# Altium PCB eHub.PcbDoc
Units mm, origin at the board's own origin, x right, y up, seen from the top; angles counter-clockwise.
Board outline 78.49 x 44.83 mm, 2 copper layers (Top Layer, Bottom Layer); 86 components, 70 nets, 303 pads, 59 vias.
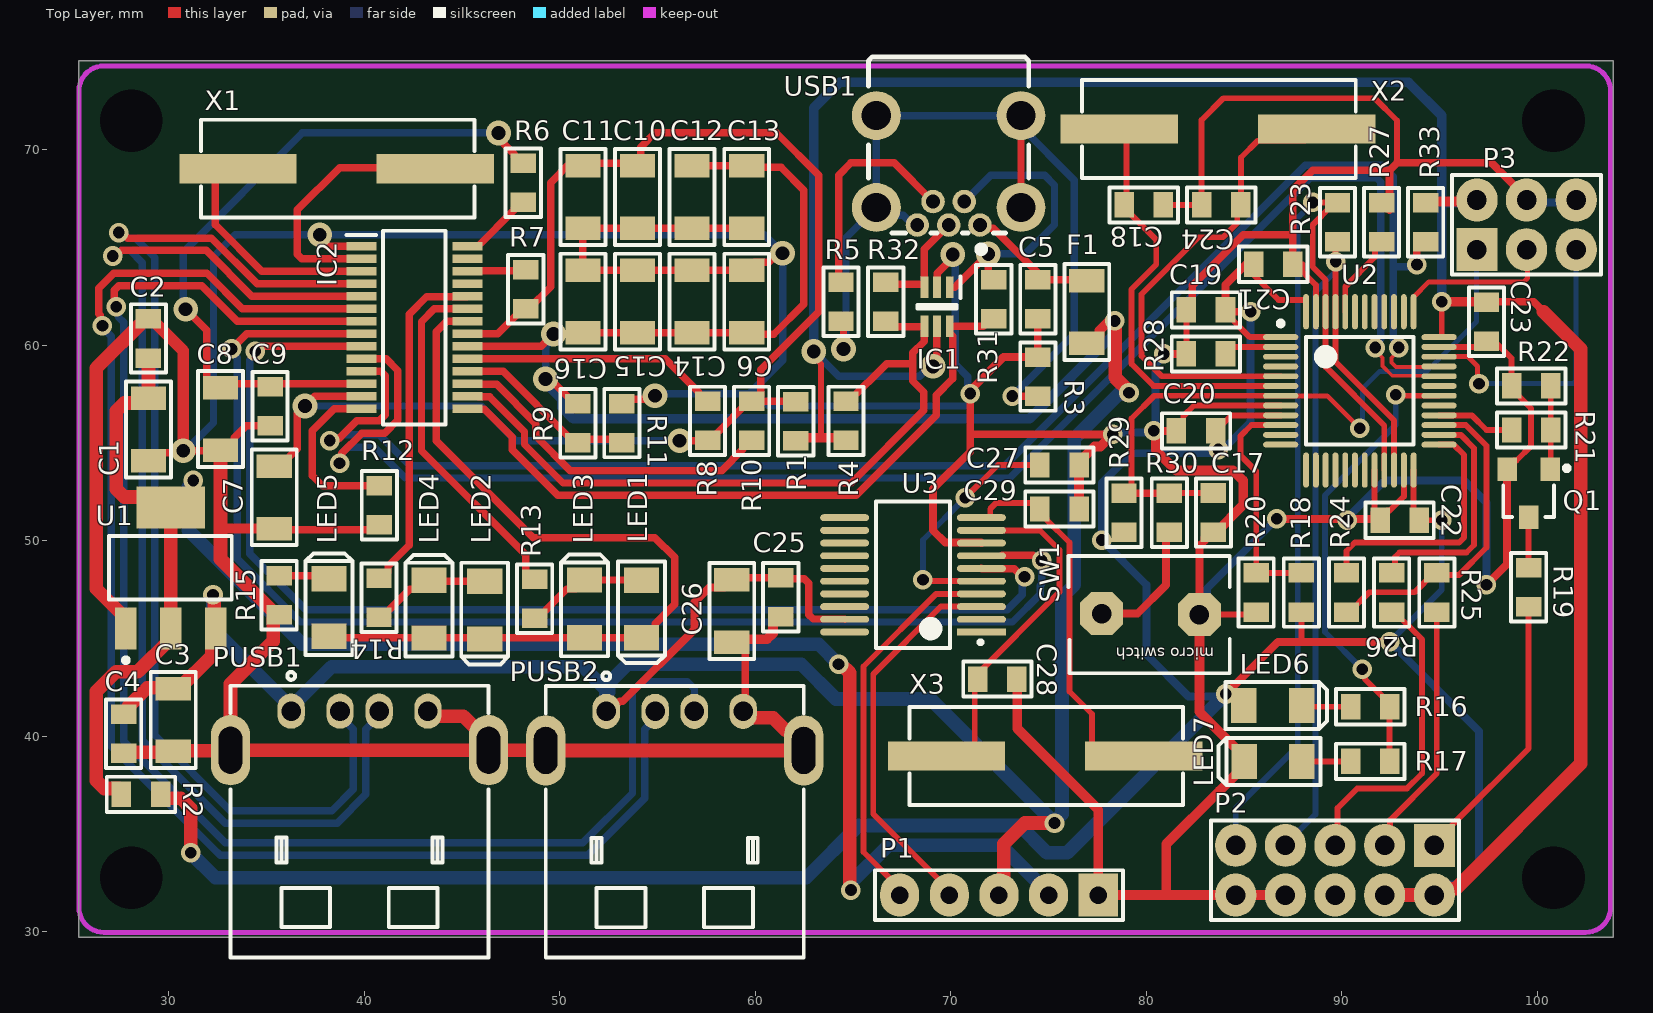
[diagram p0: Top Layer view]
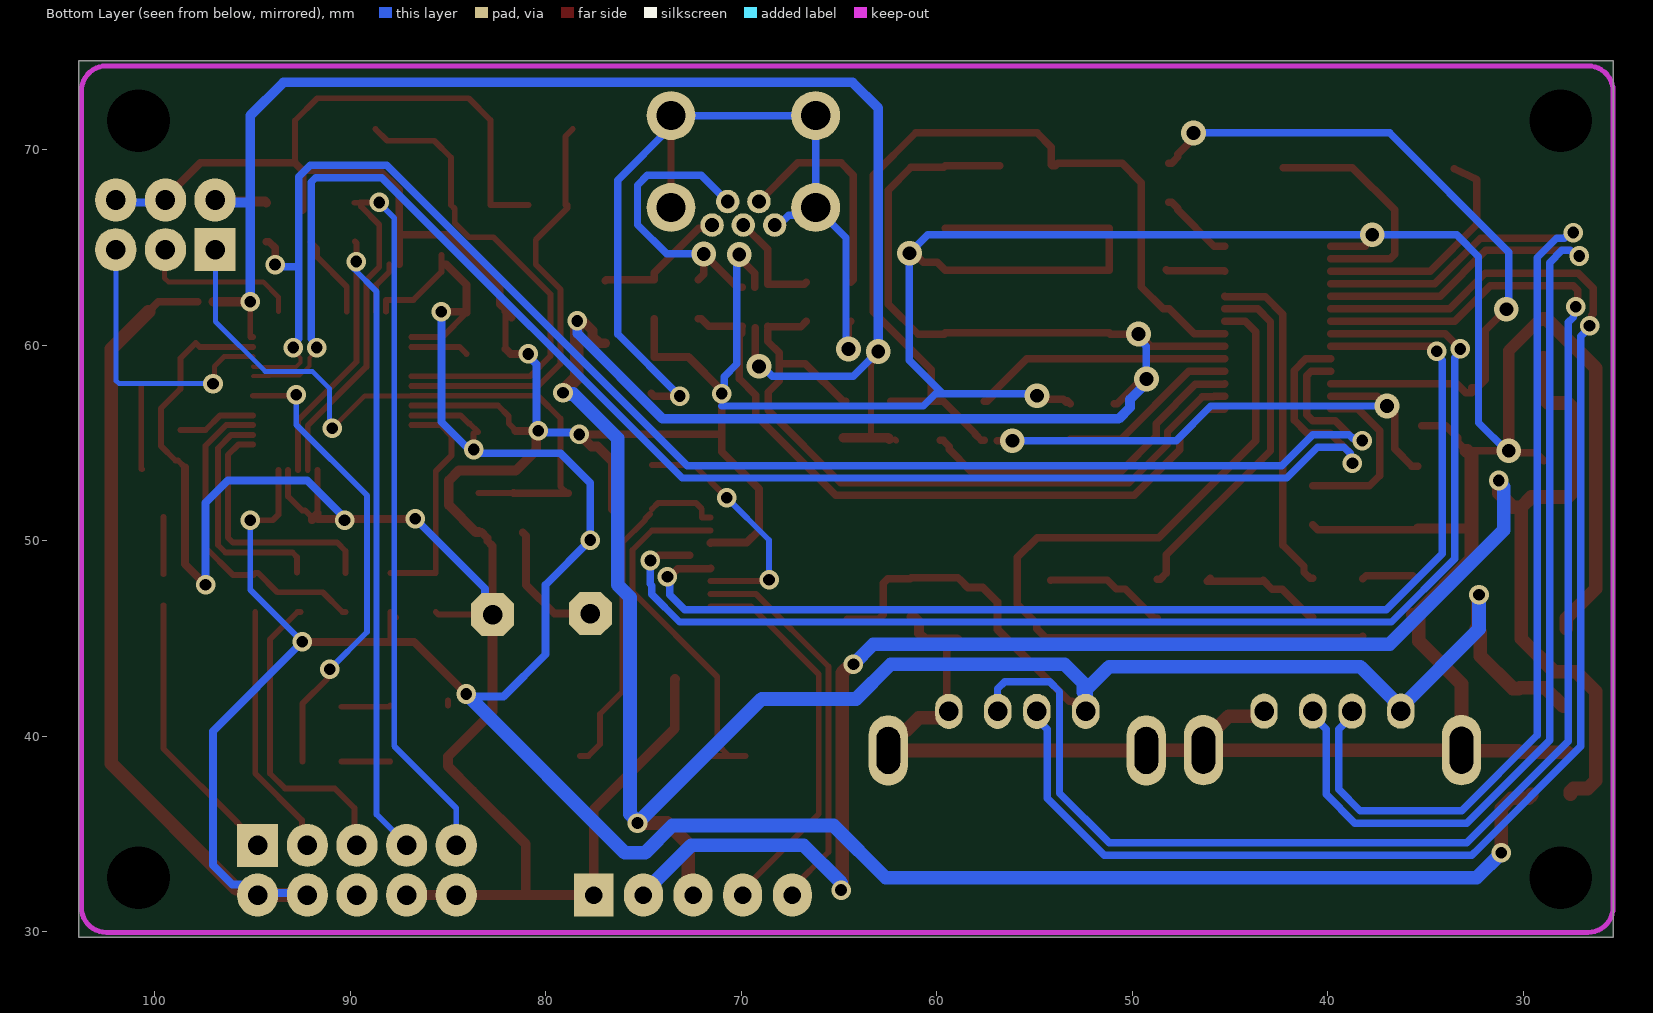
[diagram p1: Bottom Layer view, seen from below]

## Layer stack, top to bottom
Top Solder: solder mask 0.0102, Solder Resist, Dk 3.5
Top Layer: signal copper 0.0356
Dielectric 1: dielectric 0.32, FR-4, Dk 4.8
Bottom Layer: signal copper 0.0356
Bottom Solder: solder mask 0.0102, Solder Resist, Dk 3.5

## Board outline
25.4,29.718 103.886,29.718 103.886,74.549 25.4,74.549

## Design rules (kind name [scope] priority, off if disabled: settings)
Clearance [All] p1: gap=0.2 ignorepadtopadclearanceinfootprint=FALSE
DiffPairsRouting [All] p1: maxlimit=0.254 minlimit=0.254 mostfreqgap=0.254 toplayer_minwidth=0.2 toplayer_maxwidth=0.381 toplayer_prefwidth=0.381 bottomlayer_minwidth=0.2 bottomlayer_maxwidth=0.381 bottomlayer_prefwidth=0.381 maxuncoupledlength=12.7
PolygonConnect [All] p1: connectstyle=Relief reliefconductorwidth=0.254 reliefentries=4 polygonreliefangle="90 Angle" airgapwidth=0.254
RoutingVias [All] p1: holewidth=0.1 width=1 viastyle="Through Hole" minholewidth=0.5 minwidth=0.9 maxholewidth=0.6 maxwidth=3
SolderMaskExpansion [All] p1: expansion=0.102 istentingtop=FALSE
Width [All] p1: maxlimit=3 minlimit=0.254 preferedwidth=0.7
29 further rules are at their usual default settings.

## Classes and differential pairs
component class Designator: C1 C2 C3 C4 R1 R2 U1
component class Serial: C25 C26 C27 C28 C29 U3 X3
component class Programmer: C17 C18 C19 C20 C21 C22 C23 C24 LED6 LED7 P2 P3 Q1 R16 R17 R18 R19 R20 R21 R22 R23 R24 R25 R26 R27 R28 R29 R30 R33 SW1 U2 X2
component class Hub: C5 C6 C7 C8 C9 C10 C11 C12 C13 C14 C15 C16 F1 IC1 IC2 LED1 LED2 LED3 LED4 LED5 R3 R4 R5 R6 R7 R8 R9 R10 R11 R12 R13 R14 R15 R31 R32 USB1 X1
component class eHub: P1 PUSB1 PUSB2
differential pair USB: +USB_P -USB_N
differential pair SERIAL_UD: +SERIAL_UD_P -SERIAL_UD_N
differential pair PRG_UD: +PRG_UD_P -PRG_UD_N
differential pair USB_4: +USB_4_P -USB_4_N
differential pair USB_3: +USB_3_P -USB_3_N

## Components (designator, comment, footprint, x,y, rotation, side; value= is the part's Value field where it differs from the comment)
C1 "10uF" "Res 1206" 28.956,55.797 r90 top
C2 "100nF" "RES 0805" 28.956,60.351 r90 top
C3 "10uF" "Res 1206" 30.226,40.937 r90 top
C4 "100nF" "RES 0805" 27.686,40.132 r270 top
C5 "100nF" "RES 0805" 74.458,62.357 r270 top
C6 "10uF" "Res 1206" 59.563,62.137 r270 top
C7 "10uF" "Res 1206" 35.393,52.126 r270 top
C8 "10uF" "Res 1206" 32.639,56.134 r270 top
C9 "100nF" "RES 0805" 35.179,56.88 r270 top
C10 "10uF" "Res 1206" 53.975,67.691 r90 top
C11 "1uF" "Res 1206" 51.181,67.691 r90 top
C12 "10uF" "Res 1206" 56.769,67.691 r90 top
C13 "10uF" "Res 1206" 59.563,67.691 r90 top
C14 "1uF" "Res 1206" 56.769,62.137 r270 top
C15 "1uF" "Res 1206" 53.975,62.137 r270 top
C16 "47uF" "Res 1206" 51.181,62.137 r270 top
C17 "100nF" "RES 0805" 83.439,51.447 r270 top
C18 "22pF" "RES 0805" 79.883,67.183 r0 top
C19 "100nF" "RES 0805" 83.058,61.817 r180 top
C20 "100nF" "RES 0805" 82.55,55.626 r180 top
C21 "100nF" "RES 0805" 86.503,64.149 r0 top
C22 "100nF" "RES 0805" 92.964,51.054 r180 top
C23 "100nF" "RES 0805" 97.411,61.214 r270 top
C24 "22pF" "RES 0805" 83.837,67.183 r180 top
C25 "100nF" "RES 0805" 61.305,47.117 r270 top
C26 "10uF" "Res 1206" 58.801,46.506 r90 top
C27 "100nF" "RES 0805" 75.565,53.88 r0 top
C28 "22pF" "RES 0805" 72.39,42.926 r0 top
C29 "22pF" "RES 0805" 75.565,51.625 r0 top
F1 "500mA" "Res 1206" 76.962,61.607 r270 top
IC1 "USBUF02W6" SOT65P210X110-6N 69.304,61.976 r270 top
IC2 "FE1.1S-BSOP28BCN" SOP64P600X175-28N 42.561,60.911 r0 top
LED1 "LED 1206" "LED 1206" 54.176,46.391 r270 top
LED2 "LED 1206" "LED 1206" 46.16,46.327 r270 top
LED3 "LED 1206" "LED 1206" 51.271,46.645 r90 top
LED4 "LED 1206" "LED 1206" 43.306,46.628 r90 top
LED5 "LED 1206" "LED 1206" 38.198,46.708 r90 top
LED6 "LED 1206" "LED 1206" 86.602,41.571 r0 top
LED7 "LED 1206" "LED 1206" 86.36,38.717 r180 top
P1 "Header, 5-Pin" HDR1X5 77.548,31.877 r180 top
P2 "Header 5X2" HDR2X5 94.742,34.417 r180 top
P3 "Header 3X2" HDR2X3 96.922,64.897 r0 top
PUSB1 "CONN_USB_A" USB_A_REC_RA_THD 39.755,41.287 r180 top
PUSB2 "CONN_USB_A" USB_A_REC_RA_THD 55.88,41.275 r180 top
Q1 "S8050" SOT-23 99.568,52.463 r180 top
R1 "0R" "RES 0805" 62.071,56.118 r90 top
R2 "0R" "RES 0805" 28.575,37.028 r180 top
R3 "0.22R" "RES 0805" 74.458,58.403 r90 top
R4 "1K5" "RES 0805" 64.643,56.134 r90 top
R5 "100K" "RES 0805" 64.389,62.23 r90 top
R6 "0R" "RES 0805" 48.133,68.326 r90 top
R7 "10K" "RES 0805" 48.26,62.865 r270 top
R8 "100K" "RES 0805" 57.563,56.134 r270 top
R9 "4K7" "RES 0805" 50.923,56.007 r90 top
R10 "NA" "RES 0805" 59.817,56.134 r90 top
R11 "100K" "RES 0805" 53.177,56.023 r270 top
R12 "2K7/1%" "RES 0805" 40.767,51.816 r270 top
R13 "1K" "RES 0805" 48.715,47.042 r270 top
R14 "1K" "RES 0805" 40.752,47.089 r270 top
R15 "1K" "RES 0805" 35.643,47.216 r90 top
R16 "220R" "RES 0805" 91.456,41.511 r180 top
R17 "220R" "RES 0805" 91.456,38.717 r180 top
R18 "10K" "RES 0805" 87.938,47.355 r270 top
R19 "100R" "RES 0805" 99.568,47.625 r90 top
R20 "10K" "RES 0805" 85.628,47.355 r90 top
R21 "1K" "RES 0805" 99.695,55.67 r0 top
R22 "10K" "RES 0805" 99.695,57.924 r180 top
R23 "220R" "RES 0805" 89.789,66.294 r270 top
R24 "100R" "RES 0805" 90.249,47.355 r90 top
R25 "22R" "RES 0805" 94.869,47.355 r90 top
R26 "22R" "RES 0805" 92.559,47.355 r90 top
R27 "10K" "RES 0805" 92.043,66.294 r270 top
R28 "10K" "RES 0805" 83.058,59.563 r0 top
R29 "10K" "RES 0805" 78.867,51.43 r90 top
R30 "100R" "RES 0805" 81.185,51.431 r270 top
R31 "0R" "RES 0805" 72.203,62.357 r90 top
R32 "0R" "RES 0805" 66.675,62.23 r90 top
R33 "1K5" "RES 0805" 94.298,66.294 r90 top
SW1 "Pushing Switch" "micro sch" 82.724,46.226 r180 top
U1 "AMS1117" SOT-223 30.099,48.616 r0 top
U2 "STM32F103C8T6" STM-LQFP48_N 90.932,57.67 r0 top
U3 "CH340" SSOP20 68.072,48.26 r180 top
USB1 "MINI USB" "USB MINI DIP" 70.055,70.215 r0 top
X1 "12MHz" "XTAL - SMD" 38.735,68.84 r180 top
X2 "8MHz" "XTAL - SMD" 83.82,70.866 r180 top
X3 "8MHz" "XTAL - SMD" 74.983,38.789 r180 top

## Footprints (in the part's own frame and the unit in brackets; to place one, negate y for a bottom-side part, rotate by r counter-clockwise, add the part's x,y. Pads: shape width x height; smd on the part's side, far side on the other; paste and mask are expansions set on the pad)
HDR1X5 [mm] "Connector; Header; 5 Position"
  rect 2x2.2 hole 0.9: 1(0,0)
  oval 2x2.2 hole 0.9: 2(2.54,0) 3(5.08,0) 4(7.62,0) 5(10.16,0)
  silkscreen extent -1.27,-1.27 11.43,1.27, body extent -1.27,-1.21 11.43,1.28, height 9.54
HDR2X3 [mm] "Connector; Header; 3x2 Position"
  rect 2.1x2.2 hole 1: 1(0,0)
  oval 2.1x2.2 hole 1: 2(0,2.54) 3(2.54,0) 4(2.54,2.54) 5(5.08,0) 6(5.08,2.54)
  silkscreen extent -1.27,-1.27 6.35,3.81, body extent -1.33,-1.23 6.29,3.8, height 9.54
HDR2X5 [mm] "Connector; Header; 5x2 Position"
  rect 2.1x2.2 hole 1: 1(0,0)
  oval 2.1x2.2 hole 1: 2(0,2.54) 3(2.54,0) 4(2.54,2.54) 5(5.08,0) 6(5.08,2.54) 7(7.62,0) 8(7.62,2.54) 9(10.16,0) 10(10.16,2.54)
  silkscreen extent -1.27,-1.27 11.43,3.81, body extent -1.27,-1.21 11.43,3.82, height 9.54
"LED 1206" [mm]
  rect 1.3x1.8 smd: 1(-1.6,0) 2(1.35,0)
  silkscreen extent -2.55,-1.2 2.65,1.2, body extent -1.75,-0.79 1.45,0.81, height 1.1
"micro sch" [mm]
  oct 2.2x2.2 hole 1: 1(0,0) 2(5,-0.05)
  silkscreen extent -1.55,-3 6.7,3, body extent -1.56,-3 6.66,3, height 9.5
"RES 0805" [mm]
  rect 1x1.3 smd: 1(1,0) 2(-1,0)
  silkscreen extent -1.75,-0.9 1.75,0.9, body extent -1,-0.62 1,0.62, height 0.78
"Res 1206" [mm]
  rect 1.2x1.8 smd: 1(-1.7,0) 2(1.5,0)
  silkscreen extent -2.55,-1.15 2.35,1.15, body extent -1.7,-0.83 1.5,0.83
SOP64P600X175-28N [mm]
  rect 1.525x0.44 smd: 1(-2.712,4.16) 2(-2.712,3.52) 3(-2.712,2.88) 4(-2.712,2.24) 5(-2.712,1.6) 6(-2.712,0.96) 7(-2.712,0.32) 8(-2.712,-0.32) 9(-2.712,-0.96) 10(-2.712,-1.6) 11(-2.712,-2.24) 12(-2.712,-2.88) 13(-2.712,-3.52) 14(-2.712,-4.16) 15(2.712,-4.16) 16(2.712,-3.52) 17(2.712,-2.88) 18(2.712,-2.24) 19(2.712,-1.6) 20(2.712,-0.96) 21(2.712,-0.32) 22(2.712,0.32) 23(2.712,0.96) 24(2.712,1.6) 25(2.712,2.24) 26(2.712,2.88) 27(2.712,3.52) 28(2.712,4.16)
  silkscreen extent -3.47,-4.95 1.6,4.95, body extent -3,-4.95 3,4.95, height 1.75
SOT65P210X110-6N [mm]
  rect 1.1x0.4 smd: 1(-1,0.65) 2(-1,0) 3(-1,-0.65) 4(1,-0.65) 5(1,0) 6(1,0.65)
  silkscreen extent -1.55,-1 0.1,1.2, body extent -1.05,-1 1.05,1, height 1.1
SOT-23 [mm] "SOT-23; 3 Leads; Body 3.0 x 2.6 mm, inc. leads (LxW max)"
  rect 1x1.2 smd: 1(-1.1,-1.2) 2(1.1,-1.2) 3(0,1.25)
  silkscreen extent -2.08,-1.37 1.3,1.25, body extent -1.5,-1.32 1.5,1.32, height 1.08
SOT-223 [mm] "SOT-223/SC-73; 4 Leads; Body 6.7 x 7.3 mm, inc. leads (LxW max)"
  rect 1.1x2.15 smd: 1(-2.3,-3.1) 2(0,-3.1) 3(2.3,-3.1)
  rect 3.5x2.15 smd: 4(0,3.1)
  silkscreen extent -3.16,-4.85 3.12,1.63, body extent -3.26,-3.49 3.24,3.47, height 1.7
SSOP20 [mm] "SSOP20"
  rect 2.5x0.35 smd: 1(-3.5,2.925)
  oval 2.5x0.35 smd: 2(-3.5,2.275) 3(-3.5,1.625) 4(-3.5,0.975) 5(-3.5,0.325) 6(-3.5,-0.325) 7(-3.5,-0.975) 8(-3.5,-1.625) 9(-3.5,-2.275) 10(-3.5,-2.925) 11(3.5,-2.925) 12(3.5,-2.275) 13(3.5,-1.625) 14(3.5,-0.975) 15(3.5,-0.325) 16(3.5,0.325) 17(3.5,0.975) 18(3.5,1.625) 19(3.5,2.275) 20(3.5,2.925)
  silkscreen extent -3.55,-3.75 1.9,3.75, body extent -3.9,-3.6 4,3.7, height 1.79
STM-LQFP48_N [mm] "QFP, 48-Leads, Body 7x7mm, Pitch 0.5mm, IPC Medium Density"
  oval 1.8x0.3 smd: 1(-4.05,2.75) 2(-4.05,2.25) 3(-4.05,1.75) 4(-4.05,1.25) 5(-4.05,0.75) 6(-4.05,0.25) 7(-4.05,-0.25) 8(-4.05,-0.75) 9(-4.05,-1.25) 10(-4.05,-1.75) 11(-4.05,-2.25) 12(-4.05,-2.75) 25(4.05,-2.75) 26(4.05,-2.25) 27(4.05,-1.75) 28(4.05,-1.25) 29(4.05,-0.75) 30(4.05,-0.25) 31(4.05,0.25) 32(4.05,0.75) 33(4.05,1.25) 34(4.05,1.75) 35(4.05,2.25) 36(4.05,2.75)
  oval 0.3x1.8 smd: 13(-2.75,-4.05) 14(-2.25,-4.05) 15(-1.75,-4.05) 16(-1.25,-4.05) 17(-0.75,-4.05) 18(-0.25,-4.05) 19(0.25,-4.05) 20(0.75,-4.05) 21(1.25,-4.05) 22(1.75,-4.05) 23(2.25,-4.05) 24(2.75,-4.05) 37(2.75,4.05) 38(2.25,4.05) 39(1.75,4.05) 40(1.25,4.05) 41(0.75,4.05) 42(0.25,4.05) 43(-0.25,4.05) 44(-0.75,4.05) 45(-1.25,4.05) 46(-1.75,4.05) 47(-2.25,4.05) 48(-2.75,4.05)
  silkscreen extent -4.17,-2.75 2.75,3.57, body extent -3.5,-3.5 3.5,3.5, height 1.6
"USB MINI DIP" [mm]
  round 1.2 hole 0.7: 1(1.44,-4.06) 2(0.64,-2.86) 3(-0.16,-4.06) 4(-0.96,-2.86) 5(-1.76,-4.06)
  round 2.5 hole 1.5: 6(3.54,-3.16) 7(-3.86,-3.16) 8(-3.86,1.54) 9(3.54,1.54)
  silkscreen extent -4.26,-5.4 3.94,4.54, body extent -4.02,-4.15 4.13,4.67, height 3.95
USB_A_REC_RA_THD [mm] "CONN, USB A, Receptacle, RIGHT ANGLE, THD"
  oval 1.4x1.8 hole 1: 1(3.5,0) 2(1,0) 3(-1,0) 4(-3.5,0)
  oval 2x3.6 hole 1.2 slot 2.4 at 90 deg: SH1(-6.6,2) SH2(6.6,2)
  silkscreen extent -6.6,-2 6.6,12.6, body extent -7.9,-1.2 7.9,12.5, height 6.95
"XTAL - SMD" [mm]
  rect 6x1.5 smd: 1(-4.9,-0.2) 2(5.2,-0.2)
  silkscreen extent -6.9,-2.7 7.1,2.3, body extent -6.85,-2.7 7.05,2.3, height 4.5

## Part data
C1 C3 C6 C7 C8 C10 C11 C12 C13 C14 C15 C16 C26: library part "CAP 1206"
C2 C4 C5 C9 C17 C18 C19 C20 C21 C22 C23 C24 C25 C27 C28 C29: library part "CAP 0805"
F1: library part "FUSE 1206"
IC1: "Integrated Circuit", Manufacturer_Name=STMicroelectronics, Mouser Part Number=511-USBUF02W6, Arrow Part Number=USBUF02W6, Arrow Price/Stock=https://www.arrow.com/en/products/usbuf02w6/stmicroelectronics?region=nac, Datasheet Link=http://www.st.com/web/en/resource/technical/document/datasheet/CD00002046.pdf, Height=1.1mm, Manufacturer_Part_Number=USBUF02W6, Mouser Price/Stock=https://www.mouser.co.uk/ProductDetail/STMicroelectronics/USBUF02W6?qs=po45yt2pPpsSshudxXreiQ%3D%3D
IC2: "Integrated Circuit", Manufacturer_Name="Terminus Technology", Datasheet Link=https://datasheet.lcsc.com/lcsc/1811021220_Terminus-Tech-FE1-1S-BSOP28BCN_C9359.pdf, Height=1.75mm, Manufacturer_Part_Number=FE1.1S-BSOP28BCN
P1: library part "Header 5", LatestRevisionDate=17-Jul-2002, LatestRevisionNote="Re-released for DXP Platform.", Publisher="Altium Limited"
P2: "Header, 5-Pin, Dual row", LatestRevisionDate=17-Jul-2002, LatestRevisionNote="Re-released for DXP Platform.", Publisher="Altium Limited"
P3: "Header, 3-Pin, Dual row", LatestRevisionDate=17-Jul-2002, LatestRevisionNote="Re-released for DXP Platform.", Publisher="Altium Limited"
PUSB1 PUSB2: library part CONN_USB_A_REC_RA_THD, "CONN, USB, A, RECEPTACLE, R/A, THD"
Q1: library part "S8050 SMD"
R1 R2 R3 R4 R5 R6 R7 R8 R9 R11 R12 R13 R14 R15 R16 R17 R18 R19 R20 R21 R22 R23 R24 R25 R26 R27 R28 R29 R30 R31 R32 R33: library part "RES 0805"
R10: library part "RES 0805", "100K"
SW1: library part "Pushing Switch 2Pin", LatestRevisionDate=17-Jul-2002, LatestRevisionNote="Re-released for DXP Platform.", PackageReference=SPST-2, Published=24-Mar-1999, Publisher="Altium Limited"
U1: "Regulators"
U2: "ARM Cortex-M3 32-bit MCU, 64 KB Flash, 20 KB Internal RAM, 37 I/Os, 48-pin LQFP, -40 to 85 degC, Tray", I/Os (High Current)=37, Operating Frequency(F) (Processor speed) (MHz)=72, Supplier Part Number 1=497-6063-ND, Supply Voltage(Vcc) min (V)=2, A/D Converter="2x12-bit (10 Channel)", ComponentLink1Description="Manufacturer URL", ComponentLink1URL=http://www.st.com/web/en/home.html, ComponentLink2Description=Datasheet, ComponentLink2URL=http://www.st.com/st-web-ui/static/active/en/resource/technical/document/datasheet/CD00161566.pdf, ComponentLink3Description="Package Specification", ComponentLink3URL=http://www.st.com/st-web-ui/static/active/en/resource/technical/document/datasheet/DM00058181.pdf, Core="ARM Cortex-M3", DatasheetVersion="Rev. 16", FLASH Size (Prog) (kB)=64, Internal RAM Size (kB)=20, Mounting Technology="Surface Mount", PackageDescription="48-Pin Low Profile Quad Flat Package, 7 x 7 mm Body, 0.5 mm Pitch", PackageReference=LQFP48, PackageVersion="Rev. 6, 06/2013", Packing=Tray, PartNumber=STM32F103C8T6, Supplier 1=Digi-Key, Supplier 2=Farnell, Supplier 3=Newark, Supplier 4=Newark, Supplier 5=Mouser, Supplier Part Number 2=1447637, Supplier Part Number 3=59M2182, Supplier Part Number 4=57P1222, Supplier Part Number 5=511-STM32F103C8T6
U3: library part CH340T, "USB to serial chip CH340"
USB1: library part "USB MINI DIP"
X1 X2 X3: library part "XTAL - SMD"

## Free pads (board coordinates)
  round 1.524 hole 3.2: 2(100.838,32.766) 3(28.067,32.766) 4(28.067,71.501) 5(100.838,71.501)

## Via types
v1: diameter 1, hole 0.6, Top Layer to Bottom Layer, 44 vias
v2: diameter 1.27, hole 0.711, Top Layer to Bottom Layer, 15 vias

## Nets (pads, with @x,y where several pads share a name; then routed paths per layer and width w, separated by ;. In a path a pad name is that pad's centre, name@x,y a point inside that pad or via, vN(x,y) a via of type N, cw(c..) or ccw(c..) an arc to the next point about the centre after c; other vN are vias at no path point)
1V8: C8.1 C9.2 IC2.12 R6.1 | length 36.1
  Top Layer w0.381: v2(30.861,61.849) 31.832,60.878 31.93,60.78 31.93,58.243 32.339,57.834 C8.1 ; C8.1@32.639,57.58 32.939,57.58 33.39,58.031 IC2.12 ; v2(46.863,70.866) 47.033,70.696 47.033,70.426 47.673,69.785 47.673,69.636 47.983,69.326 R6.1
  Bottom Layer w0.381: v2(30.861,61.849) 30.734,61.976 30.734,64.77 36.83,70.866 v2(46.863,70.866)
3V3: C19.2 C20.2 C21.2 C22.2 C23.2 IC1.5 LED6.1 P2.2 P2.4 P3.2 R1.2 R2.2 R4.2 R18.1 R29.2 R33.1 U2.1 U2.9 U2.24 U2.36 U2.48 | length 269
  Top Layer w0.3: R1.2 R1.2@62.143,55.189 ; v2(62.992,59.69) 62.992,59.428 63.373,59.047 63.373,55.277 ; C20.2@83.475,55.574 83.9,55.999 83.942,55.999 84.363,56.42 U2.9 ; C20.2 83.693,55.483 v1(83.693,54.671) ; C19.2@84.058,61.667 85.305,60.42 U2.1 ; LED6.1 LED6.1@85.002,41.821 ; C21.2@85.344,64.629 85.344,63.754 86.778,62.32 88.182,62.32 U2.48 ; R18.1@87.669,46.085 R18.1 87.938,44.885 87.884,44.831 ; U2.24 93.682,51.336 C22.2 v1(95.123,51.054) ; U2.36 95.123,60.42 v1(95.123,62.23)
  Top Layer w0.381: v2(69.088,58.928) 69.088,59.169 69.295,59.375 IC1.5@69.295,60.892
  Top Layer w0.4: C19.2@84.058,61.667 C19.2 ; v1(84.074,42.164) 86.741,44.831 87.884,44.831 v1(92.456,44.831) ; C21.2@85.104,64.149 84.058,63.103 C19.2 ; v1(85.344,61.722) 84.153,61.722 C19.2 ; C23.2@97.804,62.23 99.822,62.23 100.33,61.722
  Top Layer w0.5: R1.2@62.428,55.206 62.5,55.277 63.373,55.277 R4.2@64.77,55.277 ; R33.1 94.369,67.365 96.85,67.365 P3.2 ; v1(95.123,62.23) C23.2@97.018,62.23
  Top Layer w0.7: R2.2 29.575,36.977 29.725,36.827 30.61,36.827 31.115,36.322 v1(31.115,34.036) ; P2.4 P2.2 ; P2.2@94.742,32.131 94.806,32.195 95.822,32.195 102.235,38.608 102.235,59.817 100.98,61.072 100.33,61.722
  Bottom Layer w0.3: v1(92.456,44.831) 95.123,47.498 v1(95.123,51.054)
  Bottom Layer w0.381: v2(62.992,59.69) 64.262,58.42 68.42,58.42 68.928,58.928 v2(69.088,58.928)
  Bottom Layer w0.4: v1@83.693,54.544 83.632,54.483 79.248,54.483 77.724,52.959 v1(77.724,50.038) 80.01,47.752 80.01,44.196 82.169,42.037 v1@83.947,42.037 ; v1@83.737,54.483 85.344,56.09 v1(85.344,61.722) ; v1(92.456,44.831) 97.028,40.259 97.028,33.401 96.042,32.415 95.436,32.415 P2.2@95.26,32.239 ; P2.4@92.964,31.623 92.964,31.962 92.987,31.985 P2.2@95.26,31.985
  Bottom Layer w0.5: v2(62.992,59.69) 62.992,72.136 64.311,73.455 93.423,73.455 95.123,71.755 95.123,67.31 ; v1(95.123,62.23) 95.123,67.31 ; P3.2@96.901,67.31 95.123,67.31
  Bottom Layer w0.7: v1(31.115,34.036) 32.385,32.766 62.611,32.766 65.278,35.433 73.533,35.433 74.93,34.036 75.946,34.036 83.947,42.037 v1(84.074,42.164)
3V3AMS: C1.2 C2.2 P1.2 R2.1 U1.2 U1.4 | length 94.2
  Top Layer w0.7: R2.1 27.575,37.178 27.425,37.328 26.699,37.328 26.289,37.738 26.289,42.291 27.305,43.307 28.415,43.307 30.099,44.991 U1.2 U1.4 ; C2.2 C1.2 28.706,57.047 27.715,57.047 27.305,56.637 27.305,52.652 27.715,52.242 29.573,52.242 U1.4 ; v1(31.242,53.086) 31.242,52.441 30.517,51.716 U1.4 ; v1(64.262,43.688) 64.389,43.688 64.84,43.237 64.84,32.188 v1(64.897,32.131)
  Bottom Layer w0.7: v1(31.242,53.086) 31.242,53.005 30.988,52.751 30.988,50.546 36.83,44.704 63.246,44.704 v1(64.262,43.688) ; v1(64.897,32.131) 64.897,32.512 66.802,34.417 72.568,34.417 75.008,31.977 P1.2
3V3Hub: C7.1 C10.2 C11.2 IC2.13 IC2.21 R1.1 R7.1 R8.1 R10.1 | length 73.1
  Top Layer w0.381: C7.1 35.693,53.826 36.576,54.708 36.576,56.515 v2(36.957,56.896) 37.452,57.391 IC2.13 ; IC2.21 46.836,60.591 48.11,61.865 48.41,61.865 49.53,62.985 49.53,68.326 50.514,69.31 53.816,69.31 C10.2@53.935,69.191 ; C10.2 54.102,69.191 54.137,69.227 54.137,70.139 54.864,70.866 61.087,70.866 63.246,68.707 63.246,61.722 60.277,58.753 60.277,57.444 R10.1@59.967,57.134 ; v2(56.134,55.118) 56.896,55.118 ; R8.1 57.713,55.134 58.022,55.444 58.022,55.489 59.667,57.134 R10.1@59.967,57.134 ; R1.1@62.357,57.134 R10.1@59.967,57.134
  Bottom Layer w0.381: v2(36.957,56.896) 45.974,56.896 47.752,55.118 v2(56.134,55.118)
5V: C3.2 C4.2 C6.2 C12.2 C13.2 C14.2 C15.2 C16.2 C25.2 C26.2 F1.2 IC2.20 P1.3 PUSB1.1 PUSB2.1 R9.1 U1.3 U3.19 | length 182.8
  Top Layer w0.381: IC2.20 49.043,59.951 v2(49.67,60.579) 51.124,60.579 C16.2 C15.2 C14.2 C6.2 59.621,60.579 60.96,60.579 62.484,62.103 62.484,67.945 61.319,69.11 59.644,69.11 C13.2 C12.2 ; v2(49.276,58.286) 49.494,58.286 50.773,57.007 R9.1 ; C26.2 58.912,48.117 C25.2 61.363,48.059 62.515,48.059 62.738,47.836 62.738,46.224 62.961,46 64.557,46 U3.19
  Top Layer w0.4: PUSB2.1@52.491,41.287 52.562,41.287 53.068,41.793 53.223,41.793 56.896,45.466 56.896,46.863 57.646,47.613 58.408,47.613 C26.2
  Top Layer w0.5: F1.2 77.262,60.107 77.612,60.457 77.612,60.757 78.081,61.226 78.376,61.226 v1(78.398,61.248)
  Top Layer w0.7: C4.2@27.94,41.529 28.894,42.483 30.18,42.483 C3.2 30.526,42.437 32.199,44.11 32.199,45.316 U1.3 32.315,45.6 32.315,47.187 v1(32.258,47.244) ; P1.3 72.717,32.126 72.717,34.49 73.787,35.56 v1(75.311,35.56) ; v1(78.398,61.248) 78.412,61.234 78.412,58.362 79.121,57.653 v1(79.121,57.572)
  Bottom Layer w0.381: v2(49.276,58.286) 49.276,59.944 49.67,60.338 v2(49.67,60.579)
  Bottom Layer w0.5: v2(49.276,58.286) 49.276,58.077 50.116,57.237 50.116,56.814 50.685,56.245 74.025,56.245 78.387,60.607 v1@78.387,61.237
  Bottom Layer w0.7: v1(32.258,47.244) 32.258,45.484 PUSB1.1@36.255,41.487 ; PUSB1.1 PUSB1.1@36.255,41.487 ; PUSB2.1@52.491,41.287 52.357,41.421 52.357,42.385 51.181,43.561 38.329,43.561 PUSB1.1@36.255,41.487 ; 52.491,42.251 52.491,42.712 53.467,43.688 62.357,43.688 64.135,41.91 68.961,41.91 v1(75.311,35.56) 75.311,35.641 75.692,36.022 75.692,47.117 76.327,47.752 76.327,55.245 78.596,57.514 79.064,57.514 v1(79.121,57.572)
CTS: U3.11
DCD: U3.14
DD_PW_EN: IC2.25
DRV: IC2.22 LED1.2 LED2.2 LED3.1 LED4.1 LED5.1 | length 43
  Top Layer w0.381: LED5.1 38.264,45.041 43.306,45.041 46.16,45.041 51.271,45.041 LED1.2 54.426,45.041 54.885,45.501 54.885,45.751 55.88,46.746 55.88,49.149 54.864,50.165 48.641,50.165 43.688,55.118 43.688,60.706 44.213,61.231 IC2.22
DSR: U3.12
DTR: U3.15
GND: C1.1 C2.1 C3.1 C4.1 C5.1 C6.1 C7.2 C8.2 C9.1 C10.1 C11.1 C12.1 C13.1 C14.1 C15.1 C16.1 C17.1 C18.1 C19.1 C20.1 C21.1 C22.1 C23.1 C24.1 C25.1 C26.1 C27.1 C28.1 C29.1 IC1.2 IC2.1 LED7.2 P1.1 P2.8 P2.10 P3.4 P3.6 PUSB1.4 PUSB1.SH1 PUSB1.SH2 PUSB2.4 PUSB2.SH1 PUSB2.SH2 Q1.2 R3.1 R11.2 R12.1 R15.2 R20.2 R22.1 R27.2 R28.2 SW1.1 U1.1 U2.8 U2.20 U2.23 U2.35 U2.47 U3.8 | length 409
  Top Layer w0.3: C18.1 C24.1 82.837,71.534 83.947,72.644 91.694,72.644 92.837,71.501 92.837,69.342 ; C20.1@81.654,55.753 81.9,55.999 81.9,56.373 82.447,56.92 U2.8 ; R28.2@82.058,59.817 82.058,61.732 C19.1 ; SW1.1 85.499,46.226 R20.2 ; 88.011,64.149 88.011,63.754 88.682,63.083 U2.47 ; C22.1@91.682,51.417 U2.20 ; C22.1@91.964,51.135 91.964,51.204 92.314,51.554 92.464,51.554 93.182,52.272 U2.23 ; U2.35 97.708,59.92 97.911,60.123 98.695,59.34 R22.1 98.695,57.774 99.695,56.774 99.695,54.864 98.944,54.113 98.818,54.113 Q1.2@98.468,53.763
  Top Layer w0.381: C1.1 29.365,54.507 30.631,54.507 v2(30.734,54.61) C8.2@32.865,54.61 ; C8.2@32.915,54.61 33.349,55.043 33.349,55.271 33.957,55.88 C9.1 ; C7.2 35.457,50.562 40.513,50.562 R12.1 ; 38.069,65.071 IC2.1 ; C11.1 C16.1 C15.1 C14.1 C6.1 59.973,64.246 60.694,64.246 61.159,64.711 v2(61.4,64.711) ; C11.1 C11.1@51.943,65.991 ; C11.1@51.943,65.991 C12.1 ; R11.2 53.32,57.166 53.387,57.099 53.538,57.25 54.694,57.25 v2(54.864,57.42) ; C12.1 C13.1 ; IC1.2 69.314,62.986 69.314,63.693 70.104,64.483 v2(70.104,64.643) ; 70.993,54.555 70.993,55.444 ; v1(70.993,57.531) 70.993,55.444 ; 76.735,55.444 70.993,55.444
  Top Layer w0.4: C26.1 59.091,44.806 59.491,44.406 PUSB2.4@59.491,41.287 ; 70.993,54.555 69.088,52.65 69.088,50.546 69.724,49.91 71.547,49.91 U3.8 ; v1(70.993,57.531) 70.993,57.693 72.702,59.403 R3.1 C5.1 ; 76.735,55.444 v1(78.287,55.444) ; v1(80.391,55.626) C20.1 ; v1(80.899,59.563) 81.804,59.563 R28.2@82.058,59.817 ; C19.1@81.758,61.432 C19.1@82.058,61.732 ; C19.1 82.358,62.117 82.358,63.054 84.963,65.659 87.503,65.659 ; SW1.1 82.724,49.732 82.989,49.997 82.989,50.147 83.289,50.447 C17.1 ; v1(86.684,51.124) 91.664,51.124 91.682,51.142 91.682,51.417 91.964,51.135 C22.1 ; C21.1 87.503,65.659 ; R27.2@92.456,66.925 92.456,68.961 ; v1(97.409,47.752) 98.468,48.811 Q1.2 Q1.2@98.468,53.763 ; P3.4@99.441,67.31 99.441,67.564 97.663,69.342 92.837,69.342 92.456,68.961 ; 87.503,65.659 87.503,67.945 88.519,68.961 92.456,68.961
  Top Layer w0.5: 32.639,50.673 32.687,50.626 C7.2 ; C26.1 58.965,44.97 60.613,44.97 60.905,45.263 60.905,45.867 61.155,46.117 C25.1 ; C28.1 73.406,42.91 73.406,40.386 77.548,36.244 P1.1 ; C29.1 C27.1 76.565,54.03 77.355,54.82 77.663,54.82 v1(78.287,55.444) ; P1.1@77.802,31.877 81.026,31.877 ; v1@80.487,55.403 80.487,54.641 81.534,53.594 84.455,53.594 84.963,53.086 84.963,51.821 83.589,50.447 C17.1 ; SW1.1 82.724,41.253 85.01,38.967 LED7.2 85.01,38.467 83.754,37.211 81.026,34.483 81.026,31.877 ; P2.8 84.963,31.877 P2.10 81.026,31.877
  Top Layer w0.6: C2.1 29.106,61.351 30.734,59.723 v2(30.734,54.61)
  Top Layer w0.7: C4.1 27.739,39.185 30.173,39.185 C3.1 30.251,39.262 33.13,39.262 PUSB1.SH2 ; U1.1 27.799,46.041 26.289,47.551 26.289,58.834 28.806,61.351 C2.1 ; C8.2@32.915,54.61 32.865,54.61 32.639,54.384 32.639,50.673 32.639,49.07 R15.2@35.493,46.216 ; R15.2 R15.2@35.493,46.216 ; PUSB1.4 43.521,41.021 45.069,41.021 46.355,39.735 PUSB1.SH1 ; PUSB2.SH2 PUSB2.SH1 62.48,39.723 61.879,40.324 61.534,40.324 60.917,40.941 59.703,40.941 59.38,41.264 PUSB2.4 ; PUSB2.SH2@49.391,39.287 PUSB1.SH1 ; PUSB1.SH2 PUSB1.SH1 ; PUSB1.SH2 33.155,42.68 35.343,44.868 35.343,46.066 R15.2@35.493,46.216
  Bottom Layer w0.381: v2(30.734,54.61) 30.846,54.61 32.284,56.049 32.284,64.542 33.401,65.659 v2(37.719,65.659) 60.452,65.659 v2(61.4,64.711) 61.4,59.241 59.69,57.531 ; v2@54.864,57.531 59.69,57.531 ; v2(70.104,64.643) 70.231,64.516 70.231,59.047 70.875,58.403 70.875,57.649 v1(70.993,57.531) ; 70.993,56.896 60.699,56.896 60.064,57.531 59.69,57.531
  Bottom Layer w0.4: v1(78.287,55.444) 78.378,55.535 80.355,55.535 80.476,55.656 80.476,59.029 80.899,59.451 v1(80.899,59.563) ; SW1.1 83.104,46.606 83.104,47.544 v1(86.684,51.124) ; v1(90.297,51.054) 90.424,51.181 90.424,51.308 92.202,53.086 96.266,53.086 97.409,51.943 v1(97.409,47.752) ; P3.4@99.441,67.31 P3.6@101.981,67.31
GNDM: R3.2 R5.2 USB1.5 USB1.6 USB1.7 USB1.8 USB1.9 | length 47.2
  Top Layer w0.381: R5.2 64.516,61.103 v2(64.516,59.817) ; v1(73.152,57.404) R3.2 R3.2 R3.2@74.611,57.556 ; USB1.9 USB1.6 USB1.6@73.748,67.208
  Bottom Layer w0.381: v2(64.516,59.817) 64.643,59.944 64.643,65.503 USB1.7 ; USB1.5 68.074,66.155 67.579,66.65 66.601,66.65 USB1.7 ; v1(73.152,57.404) 76.327,60.579 76.327,68.453 73.595,71.185 USB1.9 USB1.8 USB1.7
LED1: IC2.23 R13.2 | length 18.3
  Top Layer w0.381: IC2.23 43.583,61.871 42.926,61.214 42.926,54.61 48.255,49.281 48.255,48.352 48.565,48.042 R13.2
LED2: IC2.24 R14.2 | length 17.6
  Top Layer w0.381: R14.2 40.902,48.089 41.211,48.398 41.211,48.704 42.291,49.784 42.291,61.595 43.18,62.484 45.246,62.484 IC2.24
LED_STLINK: R16.2 R17.2 U2.30 | length 23.9
  Top Layer w0.3: v1(91.059,43.434) 91.193,43.3 91.193,42.924 92.456,41.661 R17.2 ; v1(92.765,57.476) 92.821,57.42 U2.30
  Bottom Layer w0.3: v1(91.059,43.434) 89.154,45.339 89.154,52.324 92.765,55.935 v1(92.765,57.476)
NetC27_2: C27.2 U3.5 | length 12.6
  Top Layer w0.3: v1(68.58,48.006) 68.641,47.945 71.562,47.945 U3.5 ; v1(70.739,52.197) 72.422,53.88 C27.2
  Bottom Layer w0.3: v1(68.58,48.006) 68.58,50.038 v1(70.739,52.197)
NetIC1_1: IC1.1 R31.1 USB1.2 | length 15.5
  Top Layer w0.381: IC1.1 70.215,62.976 v2(71.919,64.68) 71.919,63.641 R31.1
  Bottom Layer w0.381: USB1.2 72.047,68.707 74.803,68.707 75.311,68.199 75.311,66.167 73.824,64.68 v2(71.919,64.68)
NetIC1_3: IC1.3 R32.1 USB1.3 | length 5.6
  Top Layer w0.381: R32.1 66.786,63.119 68.645,63.119 68.655,63.129 68.655,64.915 USB1.3
NetIC2_2: IC2.2 X1.1 | length 12.2
  Top Layer w0.381: IC2.2 36.799,64.431 36.576,64.654 36.576,66.929 38.735,69.088 X1.1@42.269,69.088
NetIC2_3: IC2.3 X1.2 | length 12
  Top Layer w0.381: X1.2 32.385,68.481 32.385,66.167 34.761,63.791 IC2.3
NetIC2_14: IC2.14 R12.2 | length 8.9
  Top Layer w0.381: IC2.14 38.463,56.751 37.338,55.626 37.338,53.34 37.862,52.816 R12.2
NetIC2_18: IC2.18 R9.2 R11.1 | length 9.3
  Top Layer w0.381: IC2.18 47.109,58.671 50.595,55.186 R11.1@53.177,55.186
NetIC2_19: IC2.19 R8.2 | length 13.3
  Top Layer w0.381: IC2.19 55.386,59.311 57.103,57.593 57.103,57.443 57.413,57.134 R8.2
NetIC2_28: IC2.28 R6.2 | length 3.8
  Top Layer w0.381: IC2.28 45.815,65.071 47.673,66.929 47.673,67.017 47.983,67.326 R6.2
NetLED1_1: LED1.1 LED3.2 R13.1 | length 6.3
  Top Layer w0.381: R13.1 48.865,46.042 50.358,47.536 50.811,47.536 LED3.2 54.172,47.995 LED1.1
NetLED2_1: LED2.1 LED4.2 R14.1 | length 6.4
  Top Layer w0.381: R14.1 40.902,46.089 42.331,47.518 42.847,47.518 LED4.2 43.357,47.927 LED2.1 LED2.1@45.998,48.089
NetLED5_2: LED5.2 R15.1 | length 2.6
  Top Layer w0.381: R15.1 38.04,48.216 LED5.2
NetLED6_2: LED6.2 R16.1 | length 2.5
  Top Layer w0.3: LED6.2 88.012,41.511 R16.1
NetLED7_1: LED7.1 R17.1 | length 2.5
  Top Layer w0.3: LED7.1 R17.1
NetQ1_1: Q1.1 R21.1 R22.2 | length 4.3
  Top Layer w0.3: Q1.1 100.695,53.69 R22.2
NetQ1_3: Q1.3 R19.1 | length 2.9
  Top Layer w0.3: R19.1@99.568,48.292 Q1.3
NetR5_1: R5.1 USB1.4 | length 11.4
  Top Layer w0.381: R5.1 64.262,63.357 64.262,68.707 64.897,69.342 67.108,69.342 USB1.4
NetR18_2: R18.2 R20.1 U2.10 | length 11.9
  Top Layer w0.3: U2.10 85.384,55.92 84.833,55.369 84.833,54.359 85.628,53.564 R20.1 R18.2
NetR24_1: R24.1 U2.25 | length 13.2
  Top Layer w0.3: R24.1 90.249,49.482 90.678,49.911 96.012,49.911 96.266,50.165 96.266,54.386 95.732,54.92 U2.25
NetR24_2: R24.2 R25.1 U2.27 | length 16.7
  Top Layer w0.3: R24.2 90.399,46.355 91.415,47.371 93.735,47.371 94.719,48.355 R25.1 94.964,48.26 96.012,48.26 97.409,49.657 97.409,54.864 96.353,55.92 U2.27
NetR26_1: R26.1 U2.26 | length 12.1
  Top Layer w0.3: R26.1@92.725,48.371 92.725,49.164 92.964,49.403 96.393,49.403 96.774,49.784 96.774,54.737 96.091,55.42 U2.26
NetR27_1: R27.1 U2.44 | length 4.3
  Top Layer w0.3: U2.44 90.182,63.004 91.698,64.52 91.698,64.948 R27.1
NetR28_1: R28.1 U2.2 | length 3
  Top Layer w0.3: R28.1 84.058,59.57 84.408,59.92 U2.2
NetR30_1: R30.1 SW1.2 | length 6.7
  Top Layer w0.4: SW1.2 79.55,46.276 81.014,47.74 81.014,50.26 R30.1
OSC_IN: C24.2 U2.5 X2.1 | length 25
  Top Layer w0.3: U2.5 80.8,58.42 79.756,59.464 79.756,62.611 82.677,65.532 83.931,65.532 84.658,66.259 84.658,66.99 84.851,67.183 84.851,69.611 85.706,70.466 88.12,70.466 X2.1
OSC_IN_CH3401: C29.2 U3.10 X3.1 | length 17.8
  Top Layer w0.3: U3.10 71.998,51.185 72.021,51.208 72.021,51.634 72.33,51.943 74.248,51.943 C29.2 ; C29.2@74.677,51.363 74.915,51.125 74.915,51.069 76.073,49.911 76.073,42.291 77.226,41.138 77.226,39.589 77.826,38.989 X3.1@78.25,38.989
OSC_OUT: C18.2 U2.6 X2.2 | length 21.5
  Top Layer w0.3: X2.2 78.994,70.692 C18.2@78.994,67.183 ; C18.2 78.883,67.033 80.518,65.398 80.518,64.135 79.248,62.865 79.248,59.055 80.383,57.92 U2.6
OSC_OUT_CH3401: C28.2 U3.9 X3.2 | length 19.2
  Top Layer w0.3: X3.2 X3.2@70.631,38.989 ; U3.9 71.582,50.525 74.57,50.525 75.565,49.53 75.565,47.387 71.231,43.053 71.231,39.589 X3.2@70.631,38.989 ; X3.2@72.033,38.989 X3.2@70.631,38.989
OVC: IC2.26 R7.2 | length 3
  Top Layer w0.381: IC2.26 45.302,63.821 48.216,63.821 R7.2
PA13: P3.5 U2.34 | length 14.7
  Top Layer w0.254: U2.34 96.461,59.42 96.961,58.92 96.961,58.106 v1(97.028,58.039)
  Bottom Layer w0.254: v1(97.028,58.039) 101.832,58.039 101.981,58.188 P3.5@101.981,64.77
PA14: P3.3 U2.37 | length 8.3
  Top Layer w0.254: U2.37 93.682,62.47 94.458,63.246 99.314,63.246 99.506,63.438 99.506,64.705 P3.3@99.441,64.77
PB15: R21.2 U2.28 | length 4
  Top Layer w0.3: U2.28 96.663,56.42 97.414,55.67 R21.2
PRG_UD_N: IC2.10 U2.32 | length 81.6
  Top Layer w0.2: v1(91.723,59.885) 91.723,59.741 92.096,59.368 92.096,58.938 92.591,58.443 94.138,58.443 94.142,58.439 94.963,58.439 U2.32
  Top Layer w0.381: v1@38.872,54.23 38.853,54.249 38.853,54.479 39.88,55.506 41.036,55.506 41.71,56.18 41.71,58.714 41.115,59.309 39.851,59.309 IC2.10
  Bottom Layer w0.381: v1(38.735,53.975) 38.853,54.093 38.853,54.479 39.172,54.798 40.502,54.798 42.087,53.213 73.025,53.213 88.392,68.58 91.782,68.58 92.005,68.357 92.005,64.022 92.005,60.335
PRG_UD_P: IC2.11 R33.2 U2.33 | length 83.2
  Top Layer w0.2: v1(92.923,59.885) 92.923,59.741 92.55,59.368 92.55,59.126 92.779,58.897 94.138,58.897 94.142,58.901 94.963,58.901 U2.33
  Top Layer w0.3: v1@92.789,59.751 v1(92.923,59.885)
  Top Layer w0.381: v1(38.229,55.13) 38.347,55.249 38.725,55.249 39.617,56.141 40.773,56.141 41.075,56.443 41.075,58.45 40.852,58.674 39.851,58.674 IC2.11 ; v1(93.853,64.135) 93.853,64.985 94.163,65.294 R33.2
  Bottom Layer w0.381: v1(38.229,55.13) 38.347,55.249 38.725,55.249 38.909,55.433 40.765,55.433 42.35,53.848 72.762,53.848 88.129,69.215 92.045,69.215 92.64,68.62 92.64,64.022 92.64,63.881 ; 92.64,60.335 92.64,63.881 ; v1(93.853,64.135) 93.74,64.022 92.781,64.022 92.64,63.881
RESET: C17.2 P3.1 R29.1 R30.2 U2.7 | length 35.7
  Top Layer w0.254: U2.7 89.265,57.42 v1(90.932,55.753)
  Top Layer w0.3: R29.1 78.898,52.43 79.248,52.78 79.248,56.261 80.407,57.42 U2.7 ; 80.137,52.431 R30.2 ; R30.2@81.661,52.447 C17.2
  Top Layer w0.4: R29.1 80.137,52.43 R30.2 81.644,52.43 R30.2@81.661,52.447
  Bottom Layer w0.254: v1(90.932,55.753) 91.059,55.88 91.059,57.785 91.948,58.674 94.361,58.674 96.901,61.214 P3.1@96.901,65.098
"RESET Micro": P2.1 R19.2 | length 14.1
  Top Layer w0.3: P2.1@94.742,34.671 94.946,34.671 95.642,35.367 95.642,35.445 95.818,35.621 ; 95.819,35.621 99.568,39.37 R19.2@99.568,46.702
RI: U3.13
RTS: U3.16
RX: P1.5 U3.4 | length 19.8
  Top Layer w0.3: P1.5@67.388,32.131 67.388,32.231 65.54,34.079 65.54,43.569 69.256,47.285 U3.4
SERIAL_UD_N: IC2.8 U3.7 | length 64.7
  Top Layer w0.381: v1(33.217,59.817) 33.989,60.589 37.45,60.589 39.846,60.589 IC2.8 ; U3.7@72.632,49.25 74.221,49.25 74.479,48.992 v1(74.646,48.992)
  Bottom Layer w0.381: v1(33.217,59.817) 33.217,59.649 33.499,59.367 33.499,49.082 36.734,45.847 73.161,45.847 74.57,47.256 74.57,47.7 74.667,47.797 74.667,48.972 v1(74.646,48.992)
SERIAL_UD_P: IC2.9 U3.6 | length 60.1
  Top Layer w0.381: v1@34.64,59.954 37.187,59.954 39.846,59.954 IC2.9 ; U3.6 71.587,48.57 72.662,48.57 72.671,48.561 73.244,48.561 73.64,48.166 v1(73.777,48.166)
  Bottom Layer w0.381: v1(34.417,59.698) 34.417,59.531 34.134,59.248 34.134,49.345 36.997,46.482 72.898,46.482 73.658,47.242 73.658,48.047 v1(73.777,48.166)
SWIM_IN: P2.9 R23.2 U2.21 U2.46 | length 52.3
  Top Layer w0.3: v1(88.519,67.31) 89.065,67.31 89.456,67.31 R23.2@89.499,67.31 ; R23.2@89.456,67.163 89.456,67.111 88.519,66.174 88.519,64.008 89.182,63.345 89.182,62.47 89.182,58.9 92.182,55.9 U2.21 ; R23.2@89.499,67.294 R23.2
  Bottom Layer w0.3: P2.9@83.693,34.163 P2.9@84.455,34.925 ; P2.9 84.582,34.925 84.582,36.322 87.757,39.497 87.757,66.516 88.519,67.278 v1(88.519,67.31)
SWIM_IN1: P2.7 R23.1 U2.22 U2.45 | length 43.5
  Top Layer w0.3: v1@89.692,64.278 89.692,65.241 R23.1@89.757,65.306 ; v1@89.737,64.333 89.682,64.278 89.682,59.162 92.682,56.162 U2.22
  Bottom Layer w0.3: P2.7@87.122,34.671 87.326,34.671 88.654,35.999 88.654,62.746 89.816,63.908 v1@89.819,63.908
  other v1: 89.692,64.289
TCK(SWCLK): P2.5 R26.2 | length 15.7
  Top Layer w0.3: P2.5@89.662,34.671 89.789,34.798 89.789,36.322 90.797,37.33 93.337,37.33 94.107,38.1 94.107,44.957 92.709,46.355 R26.2
TMS(SWDIO): P2.3 R25.2 | length 12.7
  Top Layer w0.3: P2.3@92.202,34.798 92.48,35.076 92.48,35.711 94.869,38.1 R25.2
TX: P1.4 U3.3 | length 19.6
  Top Layer w0.3: P1.4@69.928,32.131 66.04,36.019 66.04,43.18 69.495,46.635 U3.3
USB_3_N: IC2.6 PUSB2.2 | length 73.7
  Top Layer w0.381: v1(26.603,61.002) 26.485,61.121 26.485,61.537 26.414,61.607 26.414,62.925 27.171,63.682 31.949,63.682 33.762,61.869 39.846,61.869 IC2.6
  Bottom Layer w0.381: v1(26.603,61.002) 26.603,60.917 27.051,60.47 27.051,39.488 32.258,34.281 32.63,33.909 51.435,33.909 54.356,36.83 54.356,40.354 54.991,40.989 PUSB2.2@54.991,41.287
USB_3_P: IC2.7 PUSB2.3 | length 75.9
  Top Layer w0.381: v1(27.305,61.976) 27.211,62.07 27.211,62.823 27.434,63.047 31.686,63.047 33.499,61.234 39.846,61.234 IC2.7
  Bottom Layer w0.381: v1(27.305,61.976) 27.423,61.858 27.423,61.442 27.686,61.179 27.686,48.076 27.686,39.751 32.893,34.544 51.172,34.544 53.721,37.093 53.721,42.291 54.229,42.799 56.515,42.799 56.891,42.423 56.891,41.387 PUSB2.3@56.991,41.287
USB_4_N: IC2.4 PUSB1.2 | length 56.8
  Top Layer w0.381: v1(27.443,65.772) 27.611,65.772 27.893,65.49 32.173,65.49 34.514,63.149 39.846,63.149 IC2.4
  Bottom Layer w0.381: v1(27.443,65.772) 27.611,65.772 27.893,65.49 28.282,65.49 29.278,64.494 29.278,40.064 33.147,36.195 38.345,36.195 39.438,37.288 39.438,40.354 38.755,41.037 PUSB1.2
USB_4_P: IC2.5 PUSB1.3 | length 58.5
  Top Layer w0.381: v1(27.129,64.572) 27.296,64.572 27.579,64.855 31.91,64.855 34.251,62.514 39.846,62.514 IC2.5
  Bottom Layer w0.381: v1(27.129,64.572) 27.296,64.572 27.579,64.855 28.019,64.855 28.643,64.231 28.643,39.801 32.884,35.56 38.608,35.56 40.073,37.025 40.073,40.354 40.755,41.037 PUSB1.3
USB_N: IC1.6 IC2.15 R31.2 | length 35.1
  Top Layer w0.381: IC2.15 45.302,56.722 46.148,56.722 47.56,55.31 47.56,54.666 49.902,52.324 65.166,52.324 68.707,55.865 69.258,56.416 69.258,57.447 70.113,58.302 70.113,60.467 69.964,60.616 IC1.6@69.964,60.805 ; IC1.6 71.672,60.976 72.053,61.357 R31.2
USB_P: IC1.4 IC2.16 R4.1 R32.2 | length 38
  Top Layer w0.381: IC2.16 45.815,57.391 45.845,57.362 46.406,57.362 48.195,55.573 48.195,54.929 50.165,52.959 64.903,52.959 68.623,56.679 68.623,57.615 68.063,58.175 68.063,59.059 ; R4.1 64.793,57.134 66.718,59.059 68.063,59.059 ; R32.2 66.945,60.96 68.645,60.96 68.654,60.969 IC1.4 ; IC1.4@68.645,60.8 68.645,60.198 68.063,59.615 68.063,59.059
VBUS: C5.2 F1.1 USB1.1 | length 6.9
  Top Layer w0.381: USB1.1 71.652,65.998 72.178,65.998 74.458,63.718 C5.2 76.912,63.357 F1.1
XRST: IC2.17 R10.2 | length 17.5
  Top Layer w0.381: IC2.17 45.302,58.002 46.773,58.002 48.776,55.999 48.776,55.364 50.546,53.594 58.277,53.594 59.357,54.675 59.357,54.825 59.667,55.134 R10.2
pads on no net: IC2.27 P2.6 U2.3 U2.4 U2.11 U2.12 U2.13 U2.14 U2.15 U2.16 U2.17 U2.18 U2.19 U2.29 U2.31 U2.38 U2.39 U2.40 U2.41 U2.42 U2.43 U3.1 U3.2 U3.17 U3.18 U3.20

## Keep-outs
Keep-Out Layer:
  lines w0.254: 61.341,29.972 102.489,29.972 ccw(c102.489,31.242) 103.759,31.242 103.759,73.025 ccw(c102.489,73.025) 102.489,74.295 26.67,74.295 ccw(c26.67,73.025) 25.4,73.025 25.4,31.242 ccw(c26.67,31.242) 26.67,29.972 28.956,29.972 61.595,29.972

## Text inside footprints (layer, text, board x,y; h text height)
SW1: Top Overlay "micro switch" at 83.474,44.726 h1 r180